# EAGLE board Mainboard_v2 (EAGLE 6.3)
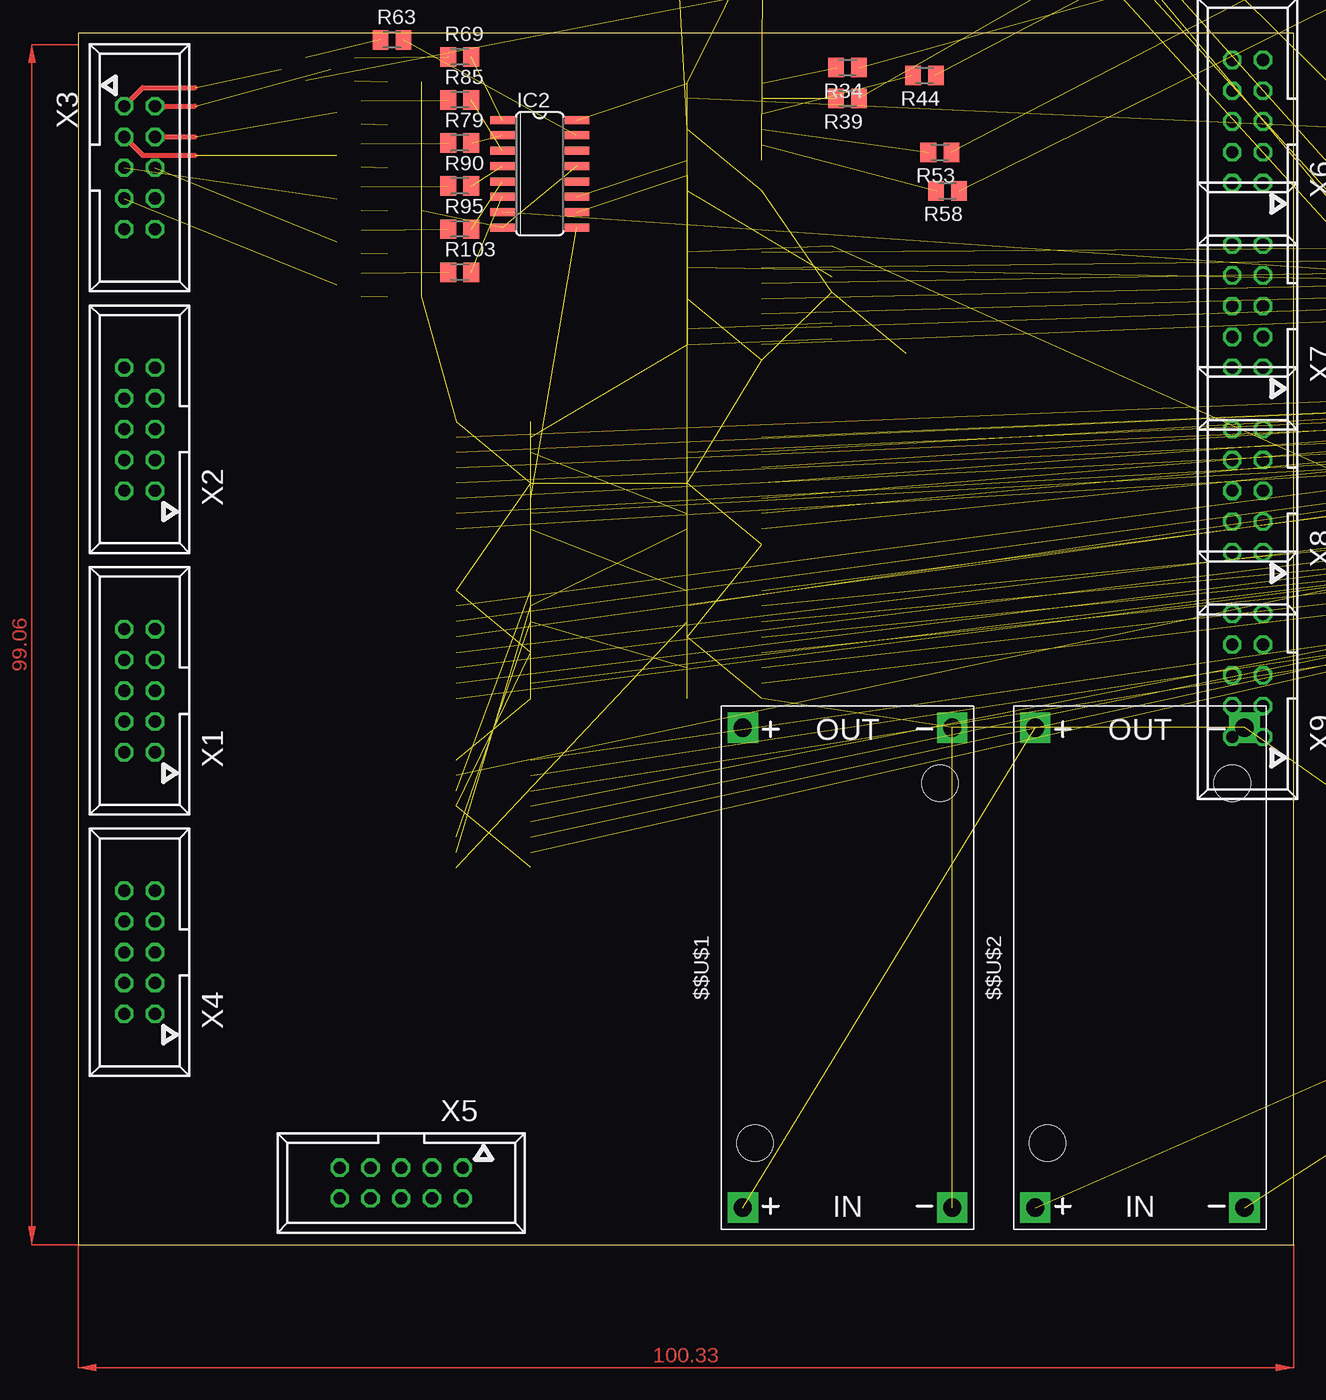
[diagram p0: board, top side]
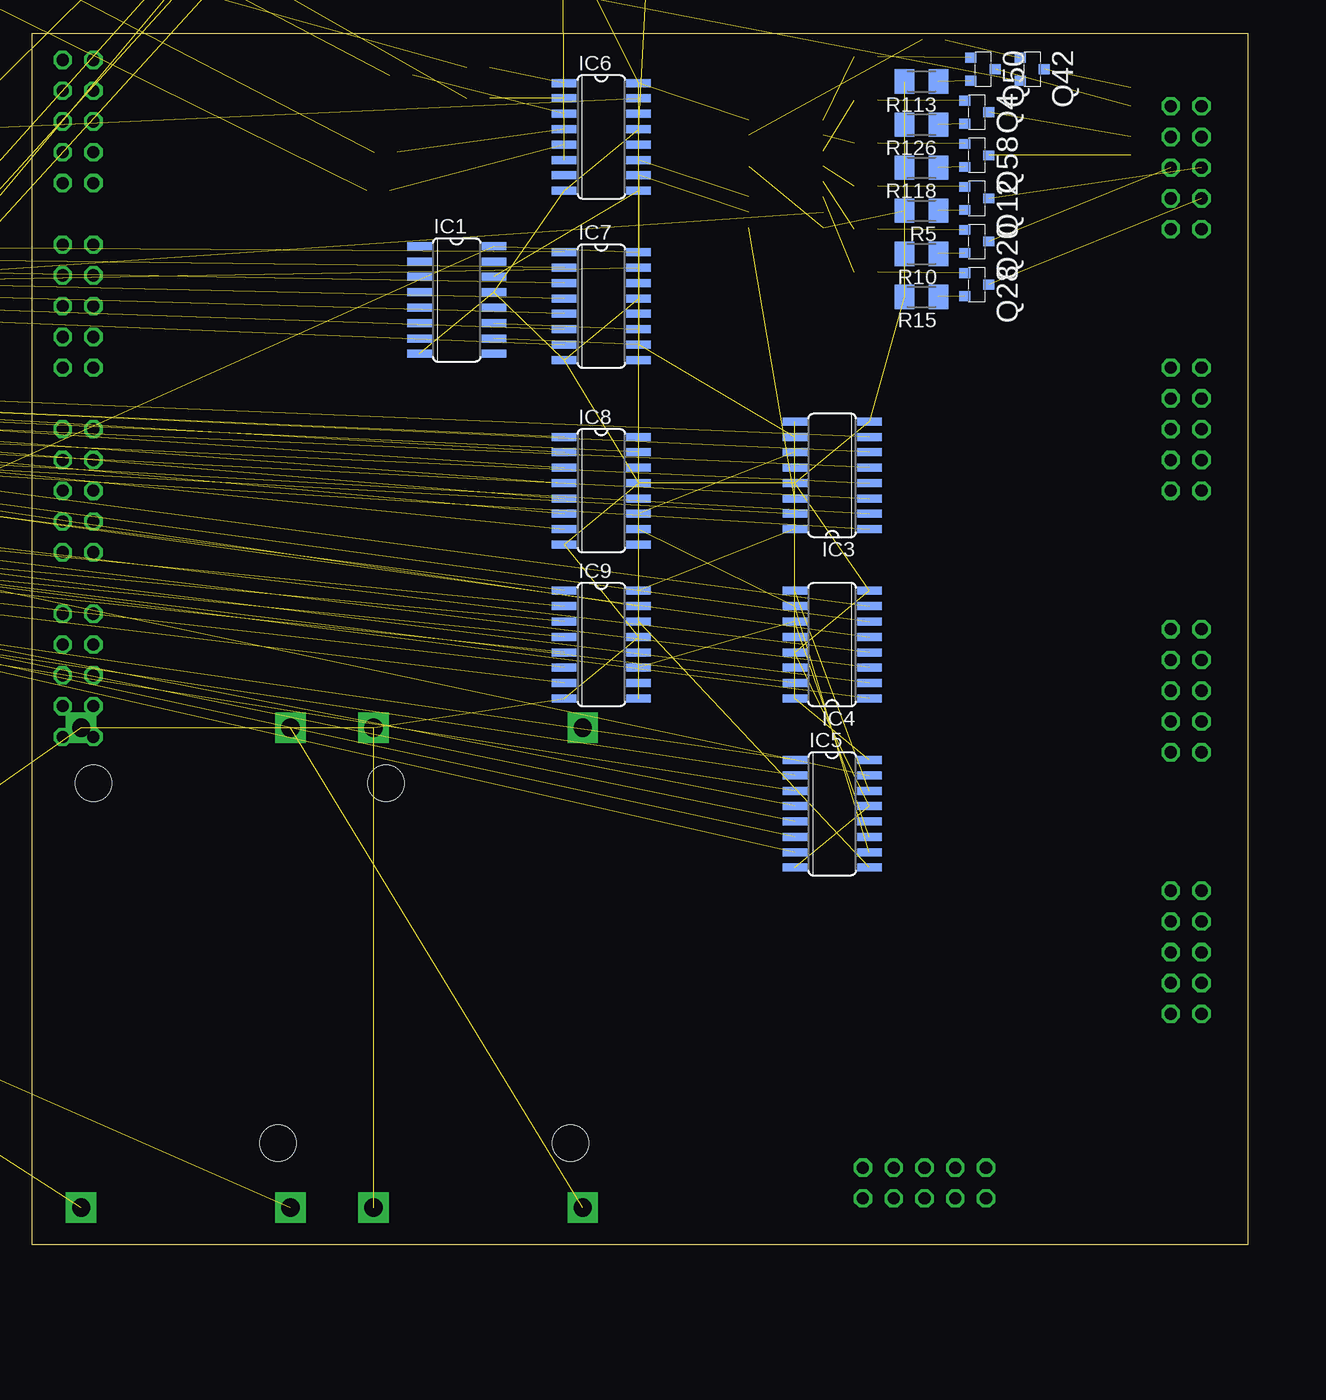
[diagram p1: board, bottom side, seen from below]

Size 100.31 x 100 mm. Coordinates in mm from the lower left corner, seen from the top.
Outline: 0,0 100.31,0 100.31,100 0,100 0,0
Copper layers (1*16): Top 0.035mm / dielectric 1.5mm / Bottom 0.035mm
Design rules "default": minimum track width 10mil, minimum drill 24mil, track to track 8mil, track to pad 8mil, pad to pad 8mil, via to via 8mil, smd to smd 8mil, copper to edge 40mil, drill to drill 8mil, minimum pad ring 10mil, minimum via ring 8mil, stop-mask expansion 4mil, vias tented up to drill 0mil, thermal gap 10mil

## Footprints (pad centres in the part's own frame; a part is rotated, then mirrored left to right if it is on the bottom)
DC-DC-STEP-DOWN-LM2596 = drill 1.5 pad 2.5 square: IN+ -19.812,8.636; IN- -19.812,-8.636; OUT+ 19.812,8.636; OUT- 19.812,-8.636 | hole 3: -14.478,7.62; 15.24,-7.62
TAN-A = smd 1.118 x 1.778: 1 0,0; 2 2.794,0
CAP0805-NP = smd 1.524 x 1.524: 1 0,0; 2 2.286,0
SOD-123 = smd 1.143 x 1.143: 1 0,0; 2 3.429,0
SO16 = smd 0.66 x 2.032: 1 -4.445,-3.073; 2 -3.175,-3.073; 3 -1.905,-3.073; 4 -0.635,-3.073; 5 0.635,-3.073; 6 1.905,-3.073; 7 3.175,-3.073; 8 4.445,-3.073; 9 4.445,3.073; 10 3.175,3.073; 11 1.905,3.073; 12 0.635,3.073; 13 -0.635,3.073; 14 -1.905,3.073; 15 -3.175,3.073; 16 -4.445,3.073
SOT223 = smd 0.95 x 2.15: 1 -2.3,-2.9; 2 0,-2.9; 3 2.3,-2.9 | smd 3.25 x 2.15: 4 0,2.9
HEAD3X2 = drill 0.914 pad 1.778 square: 1 0,0 | drill 0.914 pad 1.778: 2 0,2.54; 3 2.54,0; 4 2.54,2.54; 5 5.08,0; 6 5.08,2.54
USB-MINI-B_2 = smd 0.508 x 2.54: 1 0,0; 2 0.8,0; 3 1.6,0; 4 2.4,0; 5 3.2,0 | smd 2.286 x 1.778: 6 -2.717,5.948; 7 -2.717,0.36; 8 5.918,0.36; 9 5.918,5.948 | hole 0.813: -0.6,2.9; 3.8,2.9
1X11M = drill 0.914 square: 1 -10,0 | drill 0.914: 2 -8,0; 3 -6,0; 4 -4,0; 5 -2,0; 6 0,0; 7 2,0; 8 4,0; 9 6,0; 10 8,0; 11 10,0
LED0805 = smd 1.524 x 1.524: 1 0,0; 2 2.286,0
MICRO3 = smd 0.8 x 0.9: 1 -0.95,-1; 2 0.95,-1; 3 0,1
M1206 = smd 1.6 x 2: 1 -1.4,0; 2 1.4,0
M0805 = smd 1.3 x 1.6: 1 -0.95,0; 2 0.95,0
157SW = smd 1.016 x 1.981: 1 0,0; 2 4,0
QFP032 = smd 0.432 x 1.778: 1 0,0; 2 0.8,0; 3 1.599,0; 4 2.399,0; 5 3.199,0; 6 3.998,0; 7 4.798,0; 8 5.598,0; 17 5.588,8.001; 18 4.798,7.997; 19 3.998,7.997; 20 3.199,7.997; 21 2.399,7.997; 22 1.599,7.997; 23 0.799,7.997; 24 0,7.997 | smd 1.778 x 0.432: 9 6.807,1.194; 10 6.807,2.007; 11 6.807,2.794; 12 6.807,3.607; 13 6.807,4.394; 14 6.807,5.182; 15 6.807,5.994; 16 6.816,6.803; 25 -1.194,6.807; 26 -1.194,5.994; 27 -1.194,5.182; 28 -1.194,4.394; 29 -1.194,3.607; 30 -1.194,2.794; 31 -1.194,2.007; 32 -1.194,1.194
057-010-1 = drill 1 octagon: 1 -5.08,-1.27; 2 -5.08,1.27; 3 -2.54,-1.27; 4 -2.54,1.27; 5 0,-1.27; 6 0,1.27; 7 2.54,-1.27; 8 2.54,1.27; 9 5.08,-1.27; 10 5.08,1.27
MCV4-LOCK = drill 1.27 pad 1.905 long: 1 -5.715,0; 2 -1.905,0; 3 1.905,0; 4 5.715,0 | hole 2.4: -10.215,0; 10.215,0
MCV2-LOCK = drill 1.27 pad 1.905 long: 1 -1.905,0; 2 1.905,0 | hole 2.4: -6.405,0; 6.405,0
RESONATOR = smd 0.7 x 2: 1 -1,0; 2 0,0; 3 1,0

## Placement (x,y rotation side)
$$U$1  DC-DC-STEP-DOWN-LM2596  [DC-DC-STEP-DOWN-LM2596]  63.5,22.86 90 top
$$U$2  DC-DC-STEP-DOWN-LM2596  [DC-DC-STEP-DOWN-LM2596]  87.63,22.86 90 top
C1  4.7uF  [TAN-A]  245.11,83.82 0 top  (outside the outline)
C2  4.7uF  [TAN-A]  240.03,83.82 0 top  (outside the outline)
C3  0.1uF  [CAP0805-NP]  218.44,82.55 0 top  (outside the outline)
C4  0.1uF  [CAP0805-NP]  213.36,82.55 0 top  (outside the outline)
C5  0.1uF  [CAP0805-NP]  208.28,82.55 0 top  (outside the outline)
D1  MBR0520  [SOD-123]  233.68,83.82 0 top  (outside the outline)
IC1  74HC595D  [SO16]  65.28,77.98 270 bottom
IC2  74HC595D  [SO16]  38.1,88.39 270 top
IC3  74HC595D  [SO16]  34.29,63.5 90 bottom
IC4  74HC595D  [SO16]  34.29,49.53 90 bottom
IC5  74HC595D  [SO16]  34.29,35.56 270 bottom
IC6  74HC595D  [SO16]  53.34,91.44 270 bottom
IC7  74HC595D  [SO16]  53.34,77.47 270 bottom
IC8  74HC595D  [SO16]  53.34,62.23 270 bottom
IC9  74HC595D  [SO16]  53.34,49.53 270 bottom
IC10  LM1117MP-5.0  [SOT223]  146.05,16.51 0 top  (outside the outline)
IC11  74HC595D  [SO16]  157.48,6.35 270 top  (outside the outline)
J1  HEAD3X2  [HEAD3X2]  66.04,125.09 0 top  (outside the outline)
J2  USB-MINI-B%C  [USB-MINI-B_2]  135.89,69.85 180 top  (outside the outline)
JP1  [1X11M]  330.2,88.9 0 top  (outside the outline)
LED1  BLUE  [LED0805]  223.52,83.82 0 top  (outside the outline)
Q1  IRLML2803  [MICRO3]  203.84,167 0 bottom  (outside the outline)
Q2  IRLML2803  [MICRO3]  203.84,175.9 0 bottom  (outside the outline)
Q3  IRLML2803  [MICRO3]  203.84,158.12 0 bottom  (outside the outline)
Q4  IRLML2803  [MICRO3]  22.35,93.47 270 bottom
Q5  IRLML2803  [MICRO3]  203.84,149.22 0 bottom  (outside the outline)
Q6  IRLML2803  [MICRO3]  203.84,140.34 0 bottom  (outside the outline)
Q7  IRLML2803  [MICRO3]  203.84,131.44 0 bottom  (outside the outline)
Q8  IRLML2803  [MICRO3]  203.84,122.56 0 bottom  (outside the outline)
Q9  IRLML2803  [MICRO3]  219.07,167 0 bottom  (outside the outline)
Q10  IRLML2803  [MICRO3]  219.07,175.9 0 bottom  (outside the outline)
Q11  IRLML2803  [MICRO3]  219.07,158.12 0 bottom  (outside the outline)
Q12  IRLML2803  [MICRO3]  22.35,86.36 270 bottom
Q13  IRLML2803  [MICRO3]  219.07,149.22 0 bottom  (outside the outline)
Q14  IRLML2803  [MICRO3]  219.07,140.34 0 bottom  (outside the outline)
Q15  IRLML2803  [MICRO3]  219.07,131.44 0 bottom  (outside the outline)
Q16  IRLML2803  [MICRO3]  219.07,122.56 0 bottom  (outside the outline)
Q17  IRLML2803  [MICRO3]  234.31,167 0 bottom  (outside the outline)
Q18  IRLML2803  [MICRO3]  234.31,175.9 0 bottom  (outside the outline)
Q19  IRLML2803  [MICRO3]  234.31,158.12 0 bottom  (outside the outline)
Q20  IRLML2803  [MICRO3]  22.35,82.8 270 bottom
Q21  IRLML2803  [MICRO3]  234.31,149.22 0 bottom  (outside the outline)
Q22  IRLML2803  [MICRO3]  234.31,140.34 0 bottom  (outside the outline)
Q23  IRLML2803  [MICRO3]  234.31,131.44 0 bottom  (outside the outline)
Q24  IRLML2803  [MICRO3]  234.31,122.56 0 bottom  (outside the outline)
Q25  IRLML2803  [MICRO3]  249.56,167 0 bottom  (outside the outline)
Q26  IRLML2803  [MICRO3]  249.56,175.9 0 bottom  (outside the outline)
Q27  IRLML2803  [MICRO3]  249.56,158.12 0 bottom  (outside the outline)
Q28  IRLML2803  [MICRO3]  22.35,79.25 270 bottom
Q29  IRLML2803  [MICRO3]  249.56,149.22 0 bottom  (outside the outline)
Q30  IRLML2803  [MICRO3]  249.56,140.34 0 bottom  (outside the outline)
Q31  IRLML2803  [MICRO3]  249.56,131.44 0 bottom  (outside the outline)
Q32  IRLML2803  [MICRO3]  249.56,122.56 0 bottom  (outside the outline)
Q33  IRLML2803  [MICRO3]  264.8,167 0 bottom  (outside the outline)
Q34  IRLML2803  [MICRO3]  264.8,175.9 0 bottom  (outside the outline)
Q35  IRLML2803  [MICRO3]  264.8,158.12 0 bottom  (outside the outline)
Q36  IRLML2803  [MICRO3]  264.8,149.22 0 bottom  (outside the outline)
Q37  IRLML2803  [MICRO3]  264.8,140.34 0 bottom  (outside the outline)
Q38  IRLML2803  [MICRO3]  264.8,131.44 0 bottom  (outside the outline)
Q39  IRLML2803  [MICRO3]  264.8,122.56 0 bottom  (outside the outline)
Q40  IRLML2803  [MICRO3]  273.69,113.67 0 bottom  (outside the outline)
Q41  IRLML2803  [MICRO3]  280.04,167 0 bottom  (outside the outline)
Q42  IRLML2803  [MICRO3]  17.78,97.03 270 bottom
Q43  IRLML2803  [MICRO3]  280.04,158.12 0 bottom  (outside the outline)
Q44  IRLML2803  [MICRO3]  280.04,149.22 0 bottom  (outside the outline)
Q45  IRLML2803  [MICRO3]  280.04,140.34 0 bottom  (outside the outline)
Q46  IRLML2803  [MICRO3]  280.04,131.44 0 bottom  (outside the outline)
Q47  IRLML2803  [MICRO3]  280.04,122.56 0 bottom  (outside the outline)
Q48  IRLML2803  [MICRO3]  288.93,113.67 0 bottom  (outside the outline)
Q49  IRLML2803  [MICRO3]  295.27,167 0 bottom  (outside the outline)
Q50  IRLML2803  [MICRO3]  21.84,97.03 270 bottom
Q51  IRLML2803  [MICRO3]  295.27,158.12 0 bottom  (outside the outline)
Q52  IRLML2803  [MICRO3]  295.27,149.22 0 bottom  (outside the outline)
Q53  IRLML2803  [MICRO3]  295.27,140.34 0 bottom  (outside the outline)
Q54  IRLML2803  [MICRO3]  295.27,131.44 0 bottom  (outside the outline)
Q55  IRLML2803  [MICRO3]  295.27,122.56 0 bottom  (outside the outline)
Q56  IRLML2803  [MICRO3]  304.17,113.67 0 bottom  (outside the outline)
Q57  IRLML2803  [MICRO3]  310.51,167 0 bottom  (outside the outline)
Q58  IRLML2803  [MICRO3]  22.35,89.92 270 bottom
Q59  IRLML2803  [MICRO3]  310.51,158.12 0 bottom  (outside the outline)
Q60  IRLML2803  [MICRO3]  310.51,149.22 0 bottom  (outside the outline)
Q61  IRLML2803  [MICRO3]  310.51,140.34 0 bottom  (outside the outline)
Q62  IRLML2803  [MICRO3]  310.51,131.44 0 bottom  (outside the outline)
Q63  IRLML2803  [MICRO3]  310.51,122.56 0 bottom  (outside the outline)
Q64  IRLML2803  [MICRO3]  319.4,113.67 0 bottom  (outside the outline)
R1  15R  [M1206]  158.12,133.99 0 top  (outside the outline)
R2  15R  [M1206]  158.12,140.34 0 top  (outside the outline)
R3  1k  [M0805]  339.09,77.47 0 top  (outside the outline)
R4  1k  [M0805]  339.09,83.82 0 top  (outside the outline)
R5  15R  [M1206]  26.92,85.34 180 bottom
R6  15R  [M1206]  153.03,133.99 0 top  (outside the outline)
R7  15R  [M1206]  153.03,140.34 0 top  (outside the outline)
R8  1k  [M0805]  334.01,77.47 0 top  (outside the outline)
R9  1k  [M0805]  334.01,83.82 0 top  (outside the outline)
R10  15R  [M1206]  26.92,81.79 180 bottom
R11  15R  [M1206]  147.96,133.99 0 top  (outside the outline)
R12  15R  [M1206]  147.96,140.34 0 top  (outside the outline)
R13  1k  [M0805]  328.93,77.47 0 top  (outside the outline)
R14  1k  [M0805]  328.93,83.82 0 top  (outside the outline)
R15  15R  [M1206]  26.92,78.23 180 bottom
R16  15R  [M1206]  142.88,133.99 0 top  (outside the outline)
R17  15R  [M1206]  142.88,140.34 0 top  (outside the outline)
R18  1k  [M0805]  323.85,77.47 0 top  (outside the outline)
R19  1k  [M0805]  323.85,83.82 0 top  (outside the outline)
R20  15R  [M1206]  49.53,106.68 270 top  (outside the outline)
R21  15R  [M1206]  137.79,133.99 0 top  (outside the outline)
R22  15R  [M1206]  137.79,140.34 0 top  (outside the outline)
R23  1k  [M0805]  318.77,77.47 0 top  (outside the outline)
R24  1k  [M0805]  318.77,83.82 0 top  (outside the outline)
R25  15R  [M1206]  132.72,133.99 0 top  (outside the outline)
R26  15R  [M1206]  132.72,140.34 0 top  (outside the outline)
R27  1k  [M0805]  313.69,77.47 0 top  (outside the outline)
R28  1k  [M0805]  313.69,83.82 0 top  (outside the outline)
R29  15R  [M1206]  35.56,110.49 0 top  (outside the outline)
R30  15R  [M1206]  127.64,133.99 0 top  (outside the outline)
R31  15R  [M1206]  127.64,140.34 0 top  (outside the outline)
R32  1k  [M0805]  308.61,77.47 0 top  (outside the outline)
R33  1k  [M0805]  308.61,83.82 0 top  (outside the outline)
R34  1k  [M0805]  63.5,97.16 180 top
R35  15R  [M1206]  122.56,133.99 0 top  (outside the outline)
R36  15R  [M1206]  122.56,140.34 0 top  (outside the outline)
R37  1k  [M0805]  303.53,77.47 0 top  (outside the outline)
R38  1k  [M0805]  303.53,83.82 0 top  (outside the outline)
R39  1k  [M0805]  63.5,94.61 180 top
R40  15R  [M1206]  117.47,133.99 0 top  (outside the outline)
R41  15R  [M1206]  117.47,140.34 0 top  (outside the outline)
R42  1k  [M0805]  298.45,77.47 0 top  (outside the outline)
R43  1k  [M0805]  298.45,83.82 0 top  (outside the outline)
R44  1k  [M0805]  69.85,96.52 180 top
R45  15R  [M1206]  112.39,133.99 0 top  (outside the outline)
R46  15R  [M1206]  112.39,140.34 0 top  (outside the outline)
R47  1k  [M0805]  293.37,77.47 0 top  (outside the outline)
R48  1k  [M0805]  293.37,83.82 0 top  (outside the outline)
R49  15R  [M1206]  107.31,133.99 0 top  (outside the outline)
R50  15R  [M1206]  107.31,140.34 0 top  (outside the outline)
R51  1k  [M0805]  288.29,77.47 0 top  (outside the outline)
R52  1k  [M0805]  288.29,83.82 0 top  (outside the outline)
R53  1k  [M0805]  71.12,90.17 180 top
R54  15R  [M1206]  102.23,133.99 0 top  (outside the outline)
R55  15R  [M1206]  102.23,140.34 0 top  (outside the outline)
R56  1k  [M0805]  283.21,77.47 0 top  (outside the outline)
R57  1k  [M0805]  283.21,83.82 0 top  (outside the outline)
R58  1k  [M0805]  71.75,87 180 top
R59  15R  [M1206]  278.13,64.77 0 top  (outside the outline)
R60  15R  [M1206]  278.13,71.12 0 top  (outside the outline)
R61  1k  [M0805]  278.13,77.47 0 top  (outside the outline)
R62  1k  [M0805]  278.13,83.82 0 top  (outside the outline)
R63  1k  [M0805]  25.91,99.44 0 top
R64  15R  [M1206]  273.05,64.77 0 top  (outside the outline)
R65  15R  [M1206]  273.05,71.12 0 top  (outside the outline)
R66  1k  [M0805]  273.05,77.47 0 top  (outside the outline)
R67  1k  [M0805]  273.05,83.82 0 top  (outside the outline)
R68  15R  [M1206]  59.69,125.09 0 top  (outside the outline)
R69  1k  [M0805]  31.5,98.04 0 top
R70  15R  [M1206]  267.97,64.77 0 top  (outside the outline)
R71  15R  [M1206]  267.97,71.12 0 top  (outside the outline)
R72  1k  [M0805]  267.97,77.47 0 top  (outside the outline)
R73  1k  [M0805]  267.97,83.82 0 top  (outside the outline)
R74  15R  [M1206]  262.89,64.77 0 top  (outside the outline)
R75  15R  [M1206]  262.89,71.12 0 top  (outside the outline)
R76  1k  [M0805]  262.89,77.47 0 top  (outside the outline)
R77  1k  [M0805]  262.89,83.82 0 top  (outside the outline)
R78  15R  [M1206]  53.34,125.09 0 top  (outside the outline)
R79  1k  [M0805]  31.5,90.93 0 top
R80  15R  [M1206]  257.81,64.77 0 top  (outside the outline)
R81  15R  [M1206]  257.81,71.12 0 top  (outside the outline)
R82  1k  [M0805]  257.81,77.47 0 top  (outside the outline)
R83  1k  [M0805]  257.81,83.82 0 top  (outside the outline)
R84  15R  [M1206]  46.99,125.09 0 top  (outside the outline)
R85  1k  [M0805]  31.5,94.49 0 top
R86  15R  [M1206]  252.73,64.77 0 top  (outside the outline)
R87  15R  [M1206]  252.73,71.12 0 top  (outside the outline)
R88  1k  [M0805]  252.73,77.47 0 top  (outside the outline)
R89  15R  [M1206]  40.64,125.09 0 top  (outside the outline)
R90  1k  [M0805]  31.5,87.38 0 top
R91  15R  [M1206]  247.65,64.77 0 top  (outside the outline)
R92  15R  [M1206]  247.65,71.12 0 top  (outside the outline)
R93  1k  [M0805]  247.65,77.47 0 top  (outside the outline)
R94  15R  [M1206]  34.29,125.09 0 top  (outside the outline)
R95  1k  [M0805]  31.5,83.82 0 top
R96  15R  [M1206]  242.57,64.77 0 top  (outside the outline)
R97  1k  [M0805]  242.57,71.12 0 top  (outside the outline)
R98  1k  [M0805]  242.57,77.47 0 top  (outside the outline)
R99  15R  [M1206]  237.49,64.77 0 top  (outside the outline)
R100  1k  [M0805]  237.49,71.12 0 top  (outside the outline)
R101  1k  [M0805]  237.49,77.47 0 top  (outside the outline)
R102  15R  [M1206]  63.5,112.39 0 top  (outside the outline)
R103  1k  [M0805]  31.5,80.26 0 top
R104  15R  [M1206]  232.41,64.77 0 top  (outside the outline)
R105  1k  [M0805]  232.41,71.12 0 top  (outside the outline)
R106  1k  [M0805]  232.41,77.47 0 top  (outside the outline)
R107  15R  [M1206]  65.41,105.41 180 top  (outside the outline)
R108  1k  [M0805]  57.78,167 180 top  (outside the outline)
R109  15R  [M1206]  227.33,64.77 0 top  (outside the outline)
R110  1k  [M0805]  227.33,71.12 0 top  (outside the outline)
R111  1k  [M0805]  227.33,77.47 0 top  (outside the outline)
R112  15R  [M1206]  62.87,167 180 top  (outside the outline)
R113  15R  [M1206]  26.92,96.01 180 bottom
R114  15R  [M1206]  222.25,64.77 0 top  (outside the outline)
R115  1k  [M0805]  222.25,71.12 0 top  (outside the outline)
R116  1k  [M0805]  222.25,77.47 0 top  (outside the outline)
R117  15R  [M1206]  67.94,167 180 top  (outside the outline)
R118  15R  [M1206]  26.92,88.9 180 bottom
R119  15R  [M1206]  217.17,64.77 0 top  (outside the outline)
R120  1k  [M0805]  217.17,71.12 0 top  (outside the outline)
R121  1k  [M0805]  217.17,77.47 0 top  (outside the outline)
R122  15R  [M1206]  73.03,167 180 top  (outside the outline)
R123  15R  [M1206]  212.09,64.77 0 top  (outside the outline)
R124  1k  [M0805]  212.09,71.12 0 top  (outside the outline)
R125  1k  [M0805]  212.09,77.47 0 top  (outside the outline)
R126  15R  [M1206]  26.92,92.46 180 bottom
R127  15R  [M1206]  78.11,167 180 top  (outside the outline)
SW1  RESET  [157SW]  250.19,83.82 0 top  (outside the outline)
U1  ATMEGA328  [QFP032]  129.54,54.61 270 top  (outside the outline)
X1  057-010-1  [057-010-1]  5.08,45.72 90 top
X2  057-010-1  [057-010-1]  5.08,67.31 90 top
X3  057-010-1  [057-010-1]  5.08,88.9 270 top
X4  057-010-1  [057-010-1]  5.08,24.13 90 top
X5  057-010-1  [057-010-1]  26.67,5.08 180 top
X6  057-010-1  [057-010-1]  96.52,92.71 90 top
X7  057-010-1  [057-010-1]  96.52,77.47 90 top
X8  057-010-1  [057-010-1]  96.52,62.23 90 top
X9  057-010-1  [057-010-1]  96.52,46.99 90 top
X10  [MCV4-LOCK]  121.92,8.89 0 top  (outside the outline)
X11  [MCV2-LOCK]  123.19,21.59 0 top  (outside the outline)
Y1  16MHz  [RESONATOR]  229.87,83.82 0 top  (outside the outline)

## Library data of the parts
$$U$1 $$U$2 = diy_modules
C1-C5 D1 LED1 SW1 U1 = MySMD
IC1-IC9 IC11 = 74xx-eu
IC10 = lm1117_10; MF: Texas Instruments; MPN: LM1117MP-5.0; OC_FARNELL: 9778209; OC_NEWARK: 28X3417
J1 J2 = MyCON2
JP1 = pinhead-1
Q1-Q64 = irlml2803
R1-R127 = rcl
X1-X9 = con-panduit; OC_FARNELL: unknown; OC_NEWARK: unknown
X10 X11 = con-phoenix_3.81_mcv
Y1 = MySMD2

## Nets
+3V3: $$U$1.OUT+
+5: JP1.6
+5V: C1.1 C4.1 D1.1 IC1.16 IC2.16 IC3.16 IC4.16 IC5.16 IC6.16 IC7.16 IC8.16 IC9.16 IC10.2 IC10.4 IC11.16 J1.2 U1.4 U1.6 U1.18
+7V: $$U$1.IN+ $$U$2.OUT+
A0: U1.23
A1: U1.24
A2: U1.25
A3: U1.26
A4: U1.27
A5: U1.28
A6: U1.19
A7: U1.22
AREF: C3.1 U1.20
B_OUT$1: IC2.15 R63.2
B_OUT$2: IC2.1 R69.2
B_OUT$3: IC2.2 R79.2
B_OUT$4: IC2.3 R85.2
B_OUT$5: IC2.4 R90.2
B_OUT$6: IC2.5 R95.2
B_OUT$7: IC2.6 R103.2
B_OUT$8: IC2.7 R100.2
B_OUT$9: IC3.15 R105.2
B_OUT$10: IC3.1 R110.2
B_OUT$11: IC3.2 R115.2
B_OUT$12: IC3.3 R120.2
B_OUT$13: IC3.4 R124.2
B_OUT$14: IC3.5 R3.2
B_OUT$15: IC3.6 R42.2
B_OUT$16: IC3.7 R47.2
B_OUT$17: IC4.15 R51.2
B_OUT$18: IC4.1 R56.2
B_OUT$19: IC4.2 R61.2
B_OUT$20: IC4.3 R66.2
B_OUT$21: IC4.4 R72.2
B_OUT$22: IC4.5 R111.2
B_OUT$23: IC4.6 R116.2
B_OUT$24: IC4.7 R121.2
B_OUT$25: IC5.15 R125.2
B_OUT$26: IC5.1 R4.2
B_OUT$27: IC5.2 R9.2
B_OUT$28: IC5.3 R14.2
B_OUT$29: IC5.4 R62.2
B_OUT$30: IC5.5 R67.2
B_OUT$31: IC5.6 R73.2
B_OUT$32: IC5.7 R77.2
B_OUT$33: IC9.15 R83.2
B_OUT$34: IC9.1 R57.2
B_OUT$35: IC9.2 R97.2
B_OUT$36: IC9.3 R8.2
B_OUT$37: IC9.4 R13.2
B_OUT$38: IC9.5 R18.2
B_OUT$39: IC9.6 R23.2
B_OUT$40: IC9.7 R27.2
B_OUT$41: IC8.15 R32.2
B_OUT$42: IC8.1 R37.2
B_OUT$43: IC8.2 R76.2
B_OUT$44: IC8.3 R82.2
B_OUT$45: IC8.4 R88.2
B_OUT$46: IC8.5 R93.2
B_OUT$47: IC8.6 R98.2
B_OUT$48: IC8.7 R101.2
B_OUT$49: IC7.15 R106.2
B_OUT$50: IC7.1 R19.2
B_OUT$51: IC7.2 R24.2
B_OUT$52: IC7.3 R28.2
B_OUT$53: IC7.4 R33.2
B_OUT$54: IC7.5 R38.2
B_OUT$55: IC7.6 R43.2
B_OUT$56: IC7.7 R48.2
B_OUT$57: IC6.15 R52.2
B_OUT$58: IC6.1 R34.2
B_OUT$59: IC6.2 R39.2
B_OUT$60: IC6.3 R44.2
B_OUT$61: IC6.4 R53.2
B_OUT$62: IC6.5 R58.2
B_OUT$63: IC6.6 R108.2
B_OUT$64: IC6.7
B_OUT$65: IC1.15
B_OUT$66: IC1.1
B_OUT$67: IC1.2
B_OUT$68: IC1.3
B_OUT$69: IC1.4
B_OUT$70: IC1.5
B_OUT$71: IC1.6
B_OUT$72: IC1.7
CLOCK: IC1.11 IC2.11 IC3.11 IC4.11 IC5.11 IC6.11 IC7.11 IC8.11 IC9.11
COM: C1.2 C2.2 C3.2 C4.2 C5.2 IC10.1 J1.6 J2.1 J2.6 J2.7 J2.8 J2.9 LED1.1 SW1.1 U1.3 U1.5 U1.21 Y1.2
D0/RX: U1.30
D1/TX: U1.31
D2: U1.32
D3: U1.1
D4: U1.2
D5: U1.9
D6: U1.10
D7: U1.11
D8: U1.12
D9: U1.13
D10: U1.14
D11/MOSI: J1.4 U1.15
D12/MISO: J1.1 U1.16
D13/SCK: J1.3 U1.17
DATA: IC2.14
GND: $$U$1.IN- $$U$1.OUT- $$U$2.OUT- IC1.8 IC1.13 IC2.8 IC2.13 IC3.8 IC3.13 IC4.8 IC4.13 IC5.8 IC5.13 IC6.8 IC6.13 IC7.8 IC7.13 IC8.8 IC8.13 IC9.8 IC9.13 IC11.8 JP1.4 JP1.7 R1.2 R2.2 R5.2 R6.2 R7.2 R10.2 R11.2 R12.2 R15.2 R16.2 R17.2 R20.2 R21.2 R22.2 R25.2 R26.2 R29.2 R30.2 R31.2 R35.2 R36.2 R40.2 R41.2 R45.2 R46.2 R49.2 R50.2 R54.2 R55.2 R59.2 R60.2 R64.2 R65.2 R68.2 R70.2 R71.2 R74.2 R75.2 R78.2 R80.2 R81.2 R84.2 R86.2 R87.2 R89.2 R91.2 R92.2 R94.2 R96.2 R99.2 R104.2 R107.2 R109.2 R112.2 R113.2 R114.2 R117.2 R118.2 R119.2 R122.2 R123.2 R126.2 R127.2
GND_AUDIO_IN: JP1.2
L_AUDIO_IN: JP1.3
L_AUDIO_OUT_+: JP1.8
L_AUDIO_OUT_-: JP1.9
LATCH: IC1.10 IC2.10 IC3.10 IC4.10 IC5.10 IC6.10 IC7.10 IC8.10 IC9.10
N$1: U1.8 Y1.3
N$2: U1.7 Y1.1
N$3: LED1.2
N$4: $$U$2.IN+ X11.1
N$5: J2.3
N$6: J2.4
N$7: $$U$2.IN- X11.2
N$8: X10.1
N$9: Q40.2 R112.1
N$10: Q40.1 R62.1
N$11: IC2.9 IC3.14
N$12: Q56.2 R117.1
N$13: Q56.1 R67.1
N$14: IC3.9 IC4.14
N$15: Q64.2 R122.1
N$16: Q64.1 R73.1
N$17: IC5.9 IC9.14
N$18: Q8.2 R127.1
N$19: Q8.1 R77.1
N$20: IC4.9 IC5.14
N$21: Q16.2 R1.1
N$22: Q16.1 R83.1
N$23: IC8.14 IC9.9
N$26: Q24.2 R6.1
N$27: Q24.1 R57.1
N$28: IC7.14 IC8.9
N$29: Q32.2 R11.1
N$30: Q32.1 R97.1
N$31: IC6.14 IC7.9
N$33: Q24.3
N$34: Q16.3
N$35: Q8.3
N$37: Q56.3
N$38: Q40.3
N$39: Q39.2 R16.1
N$40: Q39.1 R100.1
N$41: IC1.14 IC6.9
N$42: Q47.2 R21.1
N$43: Q47.1 R105.1
N$45: Q55.2 R25.1
N$46: Q55.1 R110.1
N$48: Q63.2 R30.1
N$49: Q63.1 R115.1
N$51: Q7.2 R35.1
N$52: Q7.1 R120.1
N$54: Q15.2 R40.1
N$55: Q15.1 R124.1
N$57: Q23.2 R45.1
N$58: Q23.1 R3.1
N$61: Q15.3
N$62: Q7.3
N$63: Q63.3
N$64: Q55.3
N$65: Q47.3
N$67: Q31.2 R49.1
N$68: Q31.1 R8.1
N$70: Q38.2 R54.1
N$71: Q38.1 R13.1
N$73: Q46.2 R59.1
N$74: Q46.1 R18.1
N$76: Q54.2 R64.1
N$77: Q54.1 R23.1
N$79: Q62.2 R70.1
N$80: Q62.1 R27.1
N$82: Q6.2 R74.1
N$83: Q6.1 R32.1
N$85: Q14.2 R80.1
N$86: Q14.1 R37.1
N$89: Q6.3
N$90: Q62.3
N$91: Q54.3
N$92: Q46.3
N$93: Q38.3
N$94: Q31.3
N$95: Q22.2 R86.1
N$96: Q22.1 R42.1
N$98: Q30.2 R91.1
N$99: Q30.1 R47.1
N$101: Q37.2 R96.1
N$102: Q37.1 R51.1
N$104: Q45.2 R99.1
N$105: Q45.1 R56.1
N$107: Q53.2 R104.1
N$108: Q53.1 R61.1
N$110: Q61.2 R109.1
N$111: Q61.1 R66.1
N$113: Q5.2 R114.1
N$114: Q5.1 R72.1
N$117: Q61.3
N$118: Q53.3
N$119: Q45.3
N$120: Q37.3
N$121: Q30.3
N$122: Q22.3
N$123: Q13.2 R119.1
N$124: Q13.1 R76.1
N$126: Q21.2 R123.1
N$127: Q21.1 R82.1
N$129: Q29.2 R2.1
N$130: Q29.1 R88.1
N$132: Q36.2 R7.1
N$133: Q36.1 R93.1
N$135: Q44.2 R12.1
N$136: Q44.1 R98.1
N$138: Q52.2 R17.1
N$139: Q52.1 R101.1
N$141: Q60.2 R22.1
N$142: Q60.1 R106.1
N$145: Q52.3
N$146: Q44.3
N$147: Q36.3
N$148: Q29.3
N$149: Q21.3
N$150: Q13.3
N$151: Q3.2 R26.1
N$152: Q3.1 R111.1
N$154: Q11.2 R31.1
N$155: Q11.1 R116.1
N$157: Q19.2 R36.1
N$158: Q19.1 R121.1
N$160: Q27.2 R41.1
N$161: Q27.1 R125.1
N$163: Q35.2 R46.1
N$164: Q35.1 R4.1
N$166: Q43.2 R50.1
N$167: Q43.1 R9.1
N$169: Q51.2 R55.1
N$170: Q51.1 R14.1
N$173: Q43.3
N$174: Q35.3
N$175: Q27.3
N$176: Q19.3
N$177: Q11.3
N$179: Q59.2 R60.1
N$180: Q59.1 R19.1
N$182: Q1.2 R65.1
N$183: Q1.1 R24.1
N$185: Q9.2 R71.1
N$186: Q9.1 R28.1
N$188: Q17.2 R75.1
N$189: Q17.1 R33.1
N$191: Q25.2 R81.1
N$192: Q25.1 R38.1
N$194: Q33.2 R87.1
N$195: Q33.1 R43.1
N$197: Q41.2 R92.1
N$198: Q41.1 R48.1
N$201: Q33.3
N$202: Q25.3
N$203: Q58.2 R118.1
N$204: Q42.2 R107.1
N$205: Q42.1 R63.1
N$207: Q58.1 R79.1
N$208: Q50.2 R113.1
N$209: Q50.1 R69.1
N$212: Q4.2 R126.1
N$213: Q4.1 R85.1
N$215: Q12.2 R5.1
N$216: Q12.1 R90.1
N$218: Q20.2 R10.1
N$219: Q20.1 R95.1
N$221: Q28.2 R15.1
N$222: Q28.1 R103.1
N$224: Q28.3 X3.7
N$225: Q20.3 X3.6
N$226: Q12.3 X3.5
N$227: Q4.3 X3.4
N$228: Q58.3 X3.3
N$229: Q50.3 X3.2
N$230: Q42.3 X3.1
N$231: Q17.3
N$232: Q9.3
N$233: Q1.3
N$234: Q59.3
N$235: Q49.2 R68.1
N$236: Q49.1 R52.1
N$238: Q57.2 R78.1
N$239: Q57.1 R34.1
N$241: Q2.2 R84.1
N$242: Q2.1 R39.1
N$244: Q10.2 R89.1
N$245: Q10.1 R44.1
N$247: Q18.2 R94.1
N$248: Q18.1 R53.1
N$250: Q26.2 R20.1
N$251: Q26.1 R58.1
N$253: Q34.2 R29.1
N$254: Q34.1 R108.1
N$257: Q26.3
N$258: Q18.3
N$259: Q10.3
N$260: Q2.3
N$261: Q57.3
R_AUDIO_IN: JP1.1
R_AUDIO_OUT_+: JP1.11
R_AUDIO_OUT_-: JP1.10
RESET: J1.5 SW1.2 U1.29
SW: JP1.5
VIN: IC10.3
VUSB: C2.1 C5.1 D1.2 J2.5
X-D1G: Q64.3

## Tracks (layer width: path | path; a pad name or v marks a point on that pad's centre or on a via)
+5V  (18 unrouted)
+7V  (1 unrouted)
AREF  (1 unrouted)
B_OUT$1  (1 unrouted)
B_OUT$2  (1 unrouted)
B_OUT$3  (1 unrouted)
B_OUT$4  (1 unrouted)
B_OUT$5  (1 unrouted)
B_OUT$6  (1 unrouted)
B_OUT$7  (1 unrouted)
B_OUT$8  (1 unrouted)
B_OUT$9  (1 unrouted)
B_OUT$10  (1 unrouted)
B_OUT$11  (1 unrouted)
B_OUT$12  (1 unrouted)
B_OUT$13  (1 unrouted)
B_OUT$14  (1 unrouted)
B_OUT$15  (1 unrouted)
B_OUT$16  (1 unrouted)
B_OUT$17  (1 unrouted)
B_OUT$18  (1 unrouted)
B_OUT$19  (1 unrouted)
B_OUT$20  (1 unrouted)
B_OUT$21  (1 unrouted)
B_OUT$22  (1 unrouted)
B_OUT$23  (1 unrouted)
B_OUT$24  (1 unrouted)
B_OUT$25  (1 unrouted)
B_OUT$26  (1 unrouted)
B_OUT$27  (1 unrouted)
B_OUT$28  (1 unrouted)
B_OUT$29  (1 unrouted)
B_OUT$30  (1 unrouted)
B_OUT$31  (1 unrouted)
B_OUT$32  (1 unrouted)
B_OUT$33  (1 unrouted)
B_OUT$34  (1 unrouted)
B_OUT$35  (1 unrouted)
B_OUT$36  (1 unrouted)
B_OUT$37  (1 unrouted)
B_OUT$38  (1 unrouted)
B_OUT$39  (1 unrouted)
B_OUT$40  (1 unrouted)
B_OUT$41  (1 unrouted)
B_OUT$42  (1 unrouted)
B_OUT$43  (1 unrouted)
B_OUT$44  (1 unrouted)
B_OUT$45  (1 unrouted)
B_OUT$46  (1 unrouted)
B_OUT$47  (1 unrouted)
B_OUT$48  (1 unrouted)
B_OUT$49  (1 unrouted)
B_OUT$50  (1 unrouted)
B_OUT$51  (1 unrouted)
B_OUT$52  (1 unrouted)
B_OUT$53  (1 unrouted)
B_OUT$54  (1 unrouted)
B_OUT$55  (1 unrouted)
B_OUT$56  (1 unrouted)
B_OUT$57  (1 unrouted)
B_OUT$58  (1 unrouted)
B_OUT$59  (1 unrouted)
B_OUT$60  (1 unrouted)
B_OUT$61  (1 unrouted)
B_OUT$62  (1 unrouted)
B_OUT$63  (1 unrouted)
CLOCK  (8 unrouted)
COM  (17 unrouted)
D11/MOSI  (1 unrouted)
D12/MISO  (1 unrouted)
D13/SCK  (1 unrouted)
GND  (86 unrouted)
LATCH  (8 unrouted)
N$1  (1 unrouted)
N$2  (1 unrouted)
N$4  (1 unrouted)
N$7  (1 unrouted)
N$9  (1 unrouted)
N$10  (1 unrouted)
N$11  (1 unrouted)
N$12  (1 unrouted)
N$13  (1 unrouted)
N$14  (1 unrouted)
N$15  (1 unrouted)
N$16  (1 unrouted)
N$17  (1 unrouted)
N$18  (1 unrouted)
N$19  (1 unrouted)
N$20  (1 unrouted)
N$21  (1 unrouted)
N$22  (1 unrouted)
N$23  (1 unrouted)
N$26  (1 unrouted)
N$27  (1 unrouted)
N$28  (1 unrouted)
N$29  (1 unrouted)
N$30  (1 unrouted)
N$31  (1 unrouted)
N$39  (1 unrouted)
N$40  (1 unrouted)
N$41  (1 unrouted)
N$42  (1 unrouted)
N$43  (1 unrouted)
N$45  (1 unrouted)
N$46  (1 unrouted)
N$48  (1 unrouted)
N$49  (1 unrouted)
N$51  (1 unrouted)
N$52  (1 unrouted)
N$54  (1 unrouted)
N$55  (1 unrouted)
N$57  (1 unrouted)
N$58  (1 unrouted)
N$67  (1 unrouted)
N$68  (1 unrouted)
N$70  (1 unrouted)
N$71  (1 unrouted)
N$73  (1 unrouted)
N$74  (1 unrouted)
N$76  (1 unrouted)
N$77  (1 unrouted)
N$79  (1 unrouted)
N$80  (1 unrouted)
N$82  (1 unrouted)
N$83  (1 unrouted)
N$85  (1 unrouted)
N$86  (1 unrouted)
N$95  (1 unrouted)
N$96  (1 unrouted)
N$98  (1 unrouted)
N$99  (1 unrouted)
N$101  (1 unrouted)
N$102  (1 unrouted)
N$104  (1 unrouted)
N$105  (1 unrouted)
N$107  (1 unrouted)
N$108  (1 unrouted)
N$110  (1 unrouted)
N$111  (1 unrouted)
N$113  (1 unrouted)
N$114  (1 unrouted)
N$123  (1 unrouted)
N$124  (1 unrouted)
N$126  (1 unrouted)
N$127  (1 unrouted)
N$129  (1 unrouted)
N$130  (1 unrouted)
N$132  (1 unrouted)
N$133  (1 unrouted)
N$135  (1 unrouted)
N$136  (1 unrouted)
N$138  (1 unrouted)
N$139  (1 unrouted)
N$141  (1 unrouted)
N$142  (1 unrouted)
N$151  (1 unrouted)
N$152  (1 unrouted)
N$154  (1 unrouted)
N$155  (1 unrouted)
N$157  (1 unrouted)
N$158  (1 unrouted)
N$160  (1 unrouted)
N$161  (1 unrouted)
N$163  (1 unrouted)
N$164  (1 unrouted)
N$166  (1 unrouted)
N$167  (1 unrouted)
N$169  (1 unrouted)
N$170  (1 unrouted)
N$179  (1 unrouted)
N$180  (1 unrouted)
N$182  (1 unrouted)
N$183  (1 unrouted)
N$185  (1 unrouted)
N$186  (1 unrouted)
N$188  (1 unrouted)
N$189  (1 unrouted)
N$191  (1 unrouted)
N$192  (1 unrouted)
N$194  (1 unrouted)
N$195  (1 unrouted)
N$197  (1 unrouted)
N$198  (1 unrouted)
N$203  (1 unrouted)
N$204  (1 unrouted)
N$205  (1 unrouted)
N$207  (1 unrouted)
N$208  (1 unrouted)
N$209  (1 unrouted)
N$212  (1 unrouted)
N$213  (1 unrouted)
N$215  (1 unrouted)
N$216  (1 unrouted)
N$218  (1 unrouted)
N$219  (1 unrouted)
N$221  (1 unrouted)
N$222  (1 unrouted)
N$224  (1 unrouted)
N$225  (1 unrouted)
N$226  (1 unrouted)
N$227  (1 unrouted)
  Top 0.406: X3.4 9.65,91.44
N$228  (1 unrouted)
  Top 0.406: X3.3 5.33,89.92 9.65,89.92
N$229  (1 unrouted)
  Top 0.406: X3.2 9.65,93.98
N$230  (1 unrouted)
  Top 0.406: X3.1 5.33,95.5 9.65,95.5
N$235  (1 unrouted)
N$236  (1 unrouted)
N$238  (1 unrouted)
N$239  (1 unrouted)
N$241  (1 unrouted)
N$242  (1 unrouted)
N$244  (1 unrouted)
N$245  (1 unrouted)
N$247  (1 unrouted)
N$248  (1 unrouted)
N$250  (1 unrouted)
N$251  (1 unrouted)
N$253  (1 unrouted)
N$254  (1 unrouted)
RESET  (2 unrouted)
VUSB  (3 unrouted)
(copper drawn outside any net)
  shapes: Top area x2